# EAGLE board Top_PCB (EAGLE 7.7.0)
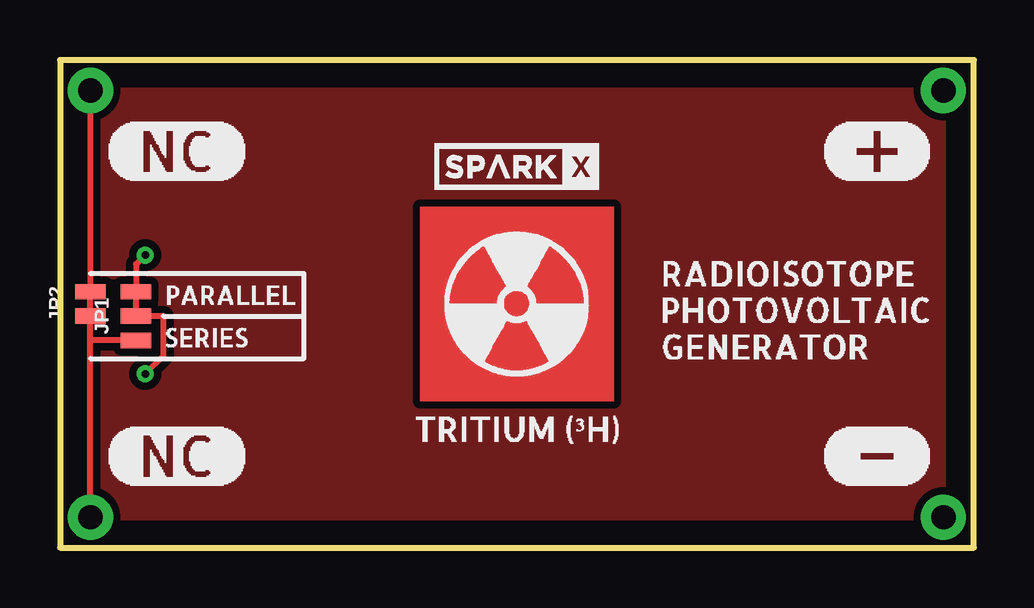
[diagram p0: board, top side]
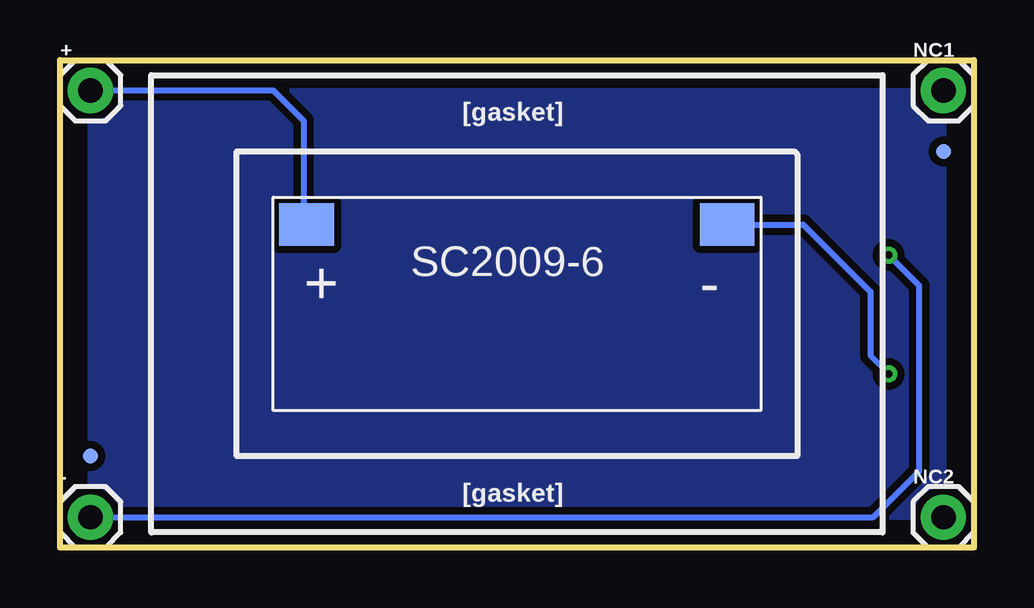
[diagram p1: board, bottom side, seen from below]

Size 38.1 x 20.32 mm. Coordinates in mm from the lower left corner, seen from the top.
Outline: 38.1,20.32 0,20.32 0,0 38.1,0 38.1,20.32
Copper layers (1*16): Top 0.035mm / dielectric 1.5mm / Bottom 0.035mm
Design rules "default": minimum track width 10mil, minimum drill 0.6mm, track to track 8mil, track to pad 8mil, pad to pad 8mil, via to via 8mil, smd to smd 8mil, copper to edge 40mil, drill to drill 8mil, minimum pad ring 10mil, minimum via ring 8mil, stop-mask expansion 4mil, vias tented up to drill 0mil, thermal gap 10mil

## Footprints (pad centres in the part's own frame; a part is rotated, then mirrored left to right if it is on the bottom)
1X01 = drill 1.016 pad 1.88: 1 0,0
FIDUCIAL-MICRO = smd 0.635 x 0.635: 1 0,0
SMT-JUMPER_3_1-NC_TRACE_NO-SILK = smd 0.635 x 1.27: 1 -1.016,0; 2 0,0; 3 1.016,0
SMT-JUMPER_2_NC_TRACE_NO-SILK = smd 0.635 x 1.27: 1 -0.508,0; 2 0.508,0
20X9MM = smd 2.286 x 1.778: + -8.763,3.302; - 8.763,3.302

## Placement (x,y rotation side)
+  [1X01]  36.83,19.05 0 bottom
-  [1X01]  36.83,1.27 0 bottom
FD1  FIDUCIALUFIDUCIAL  [FIDUCIAL-MICRO]  36.83,3.81 0 bottom
FD2  FIDUCIALUFIDUCIAL  [FIDUCIAL-MICRO]  1.27,16.51 0 bottom
JP1  JUMPER-SMT_3_1-NC_TRACE_NO-SILK  [SMT-JUMPER_3_1-NC_TRACE_NO-SILK]  3.18,9.65 90 top
JP2  JUMPER-SMT_2_NC_TRACE_NO-SILK  [SMT-JUMPER_2_NC_TRACE_NO-SILK]  1.27,10.16 90 top
NC1  [1X01]  1.27,19.05 0 bottom
NC2  [1X01]  1.27,1.27 0 bottom
U$1  9X20_AMORPHOUS_PV  [20X9MM]  19.05,10.16 0 bottom
U$2  [RADIATION_TREFOIL_SIGN_SYMBOL_WARNING_SIGN_SYMBOL_CLASSIC_ROUND_STICKER#RCB13028D4AAD443CA303E61808FDC84C_V9WAF_8BYVR_540#JPG]  19.05,10.16 0 top
U$3  [TRITIUM_##H#0]  13.84,4.95 0 top
U$4  [SPARKX-SMALL]  19.05,15.88 0 top
U$5  [RADIOISOTOPE0]  24.13,11.43 0 top
U$6  [PHOTOVOLTAIC1]  24.13,9.91 0 top
U$7  [PARALLEL1]  3.68,10.54 0 top
U$8  [SERIES0]  3.68,8.76 0 top
U$9  [#0]  31.75,16.51 0 top
U$10  [#1]  31.75,3.81 0 top
U$11  [NC0]  1.91,16.51 0 top
U$12  [NC0]  1.91,3.81 0 top
U$13  [GENERATOR0]  24.13,8.38 0 top

## Library data of the parts
+ - NC1 NC2 = SparkFun-Connectors
FD1 FD2 = SparkFun-Aesthetics
JP1 JP2 = SparkFun-Jumpers
U$1 U$4 = SparkX
U$2 = radiation_trefoil_sign_symbol_warning_sign_symbol_classic_round_sticker#rcb13028d4aad443ca303e61808fdc84c_v9waf_8byvr_540#jpg (2)
U$3 = buzzard_labels (2)
U$5 U$6 = buzzard_labels (3)
U$7 U$8 = buzzard_labels (6)
U$9 U$10 = buzzard_labels (9)
U$11 U$12 = buzzard_labels (11)
U$13 = buzzard_labels (12)

## Nets
N$1: +.1 U$1.+
N$2: JP1.2 U$1.-
N$3: -.1 JP1.3
N$4: JP1.1 JP2.1 NC2.1
N$5: JP2.2 NC1.1

## Tracks (layer width: path | path; a pad name or v marks a point on that pad's centre or on a via)
N$1
  Bottom 0.254: +.1 29.21,19.05 27.94,17.78 27.94,13.59 U$1.+
N$2  (via drill 0.3)
  Top 0.254: v3.56,7.24 4.32,8 4.32,9.65 JP1.2
  Bottom 0.254: U$1.- 7.11,13.46 4.32,10.67 4.32,8 v3.56,7.24
N$3  (via drill 0.3)
  Top 0.254: v3.56,12.19 3.18,11.81 JP1.3
  Bottom 0.254: -.1 4.19,1.27 2.29,3.17 2.29,10.92 v3.56,12.19
N$4
  Top 0.254: NC2.1 1.27,8.64 | 1.27,8.64 JP2.1 | JP1.1 1.27,8.64
N$5
  Top 0.254: NC1.1 JP2.2
N$6
  pour Bottom (isolate 0.305): 38.1,20.32 0,20.32 0,0 38.1,0
N$7
  pour Top (isolate 0.305): 38.1,20.32 0,20.32 0,0 38.1,0

## Text on the board
bPlace: [gasket] | [gasket]